# Altium PCB BLE-Control.PcbDoc
Units mm, origin at the board's own origin, x right, y up, seen from the top; angles counter-clockwise.
Board outline 41 x 30 mm, 4 copper layers (L1_TOP, L2_GND, L3_PWR_SIG, L4_BOTTOM), stack 0.956 mm thick; 99 components, 88 nets, 303 pads, 0 vias.
Unrouted connection lines stored in the file: 210.
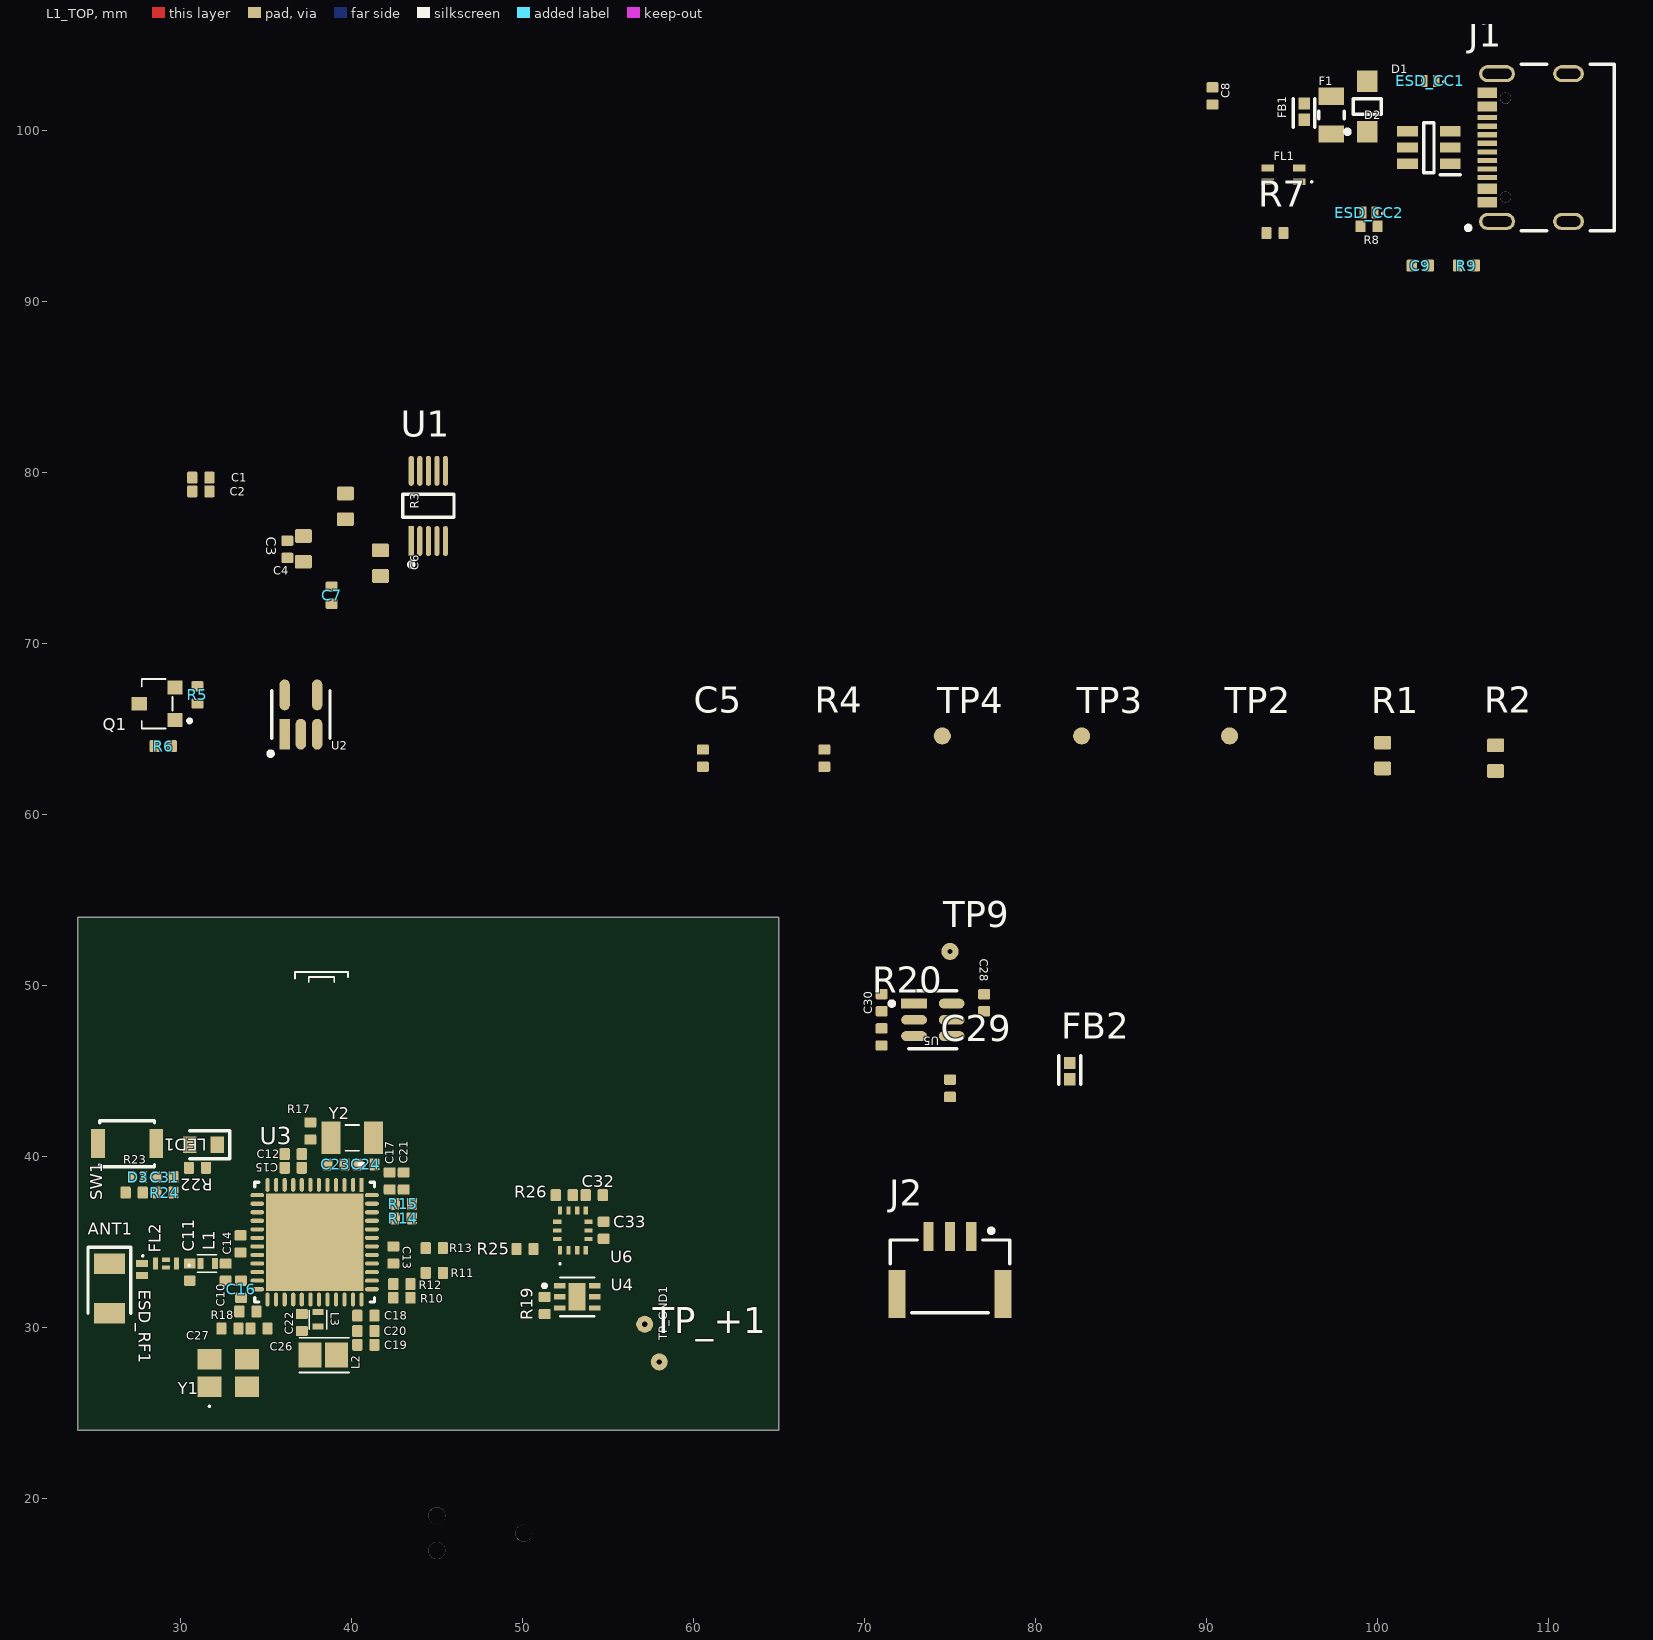
[diagram p0: L1_TOP view]
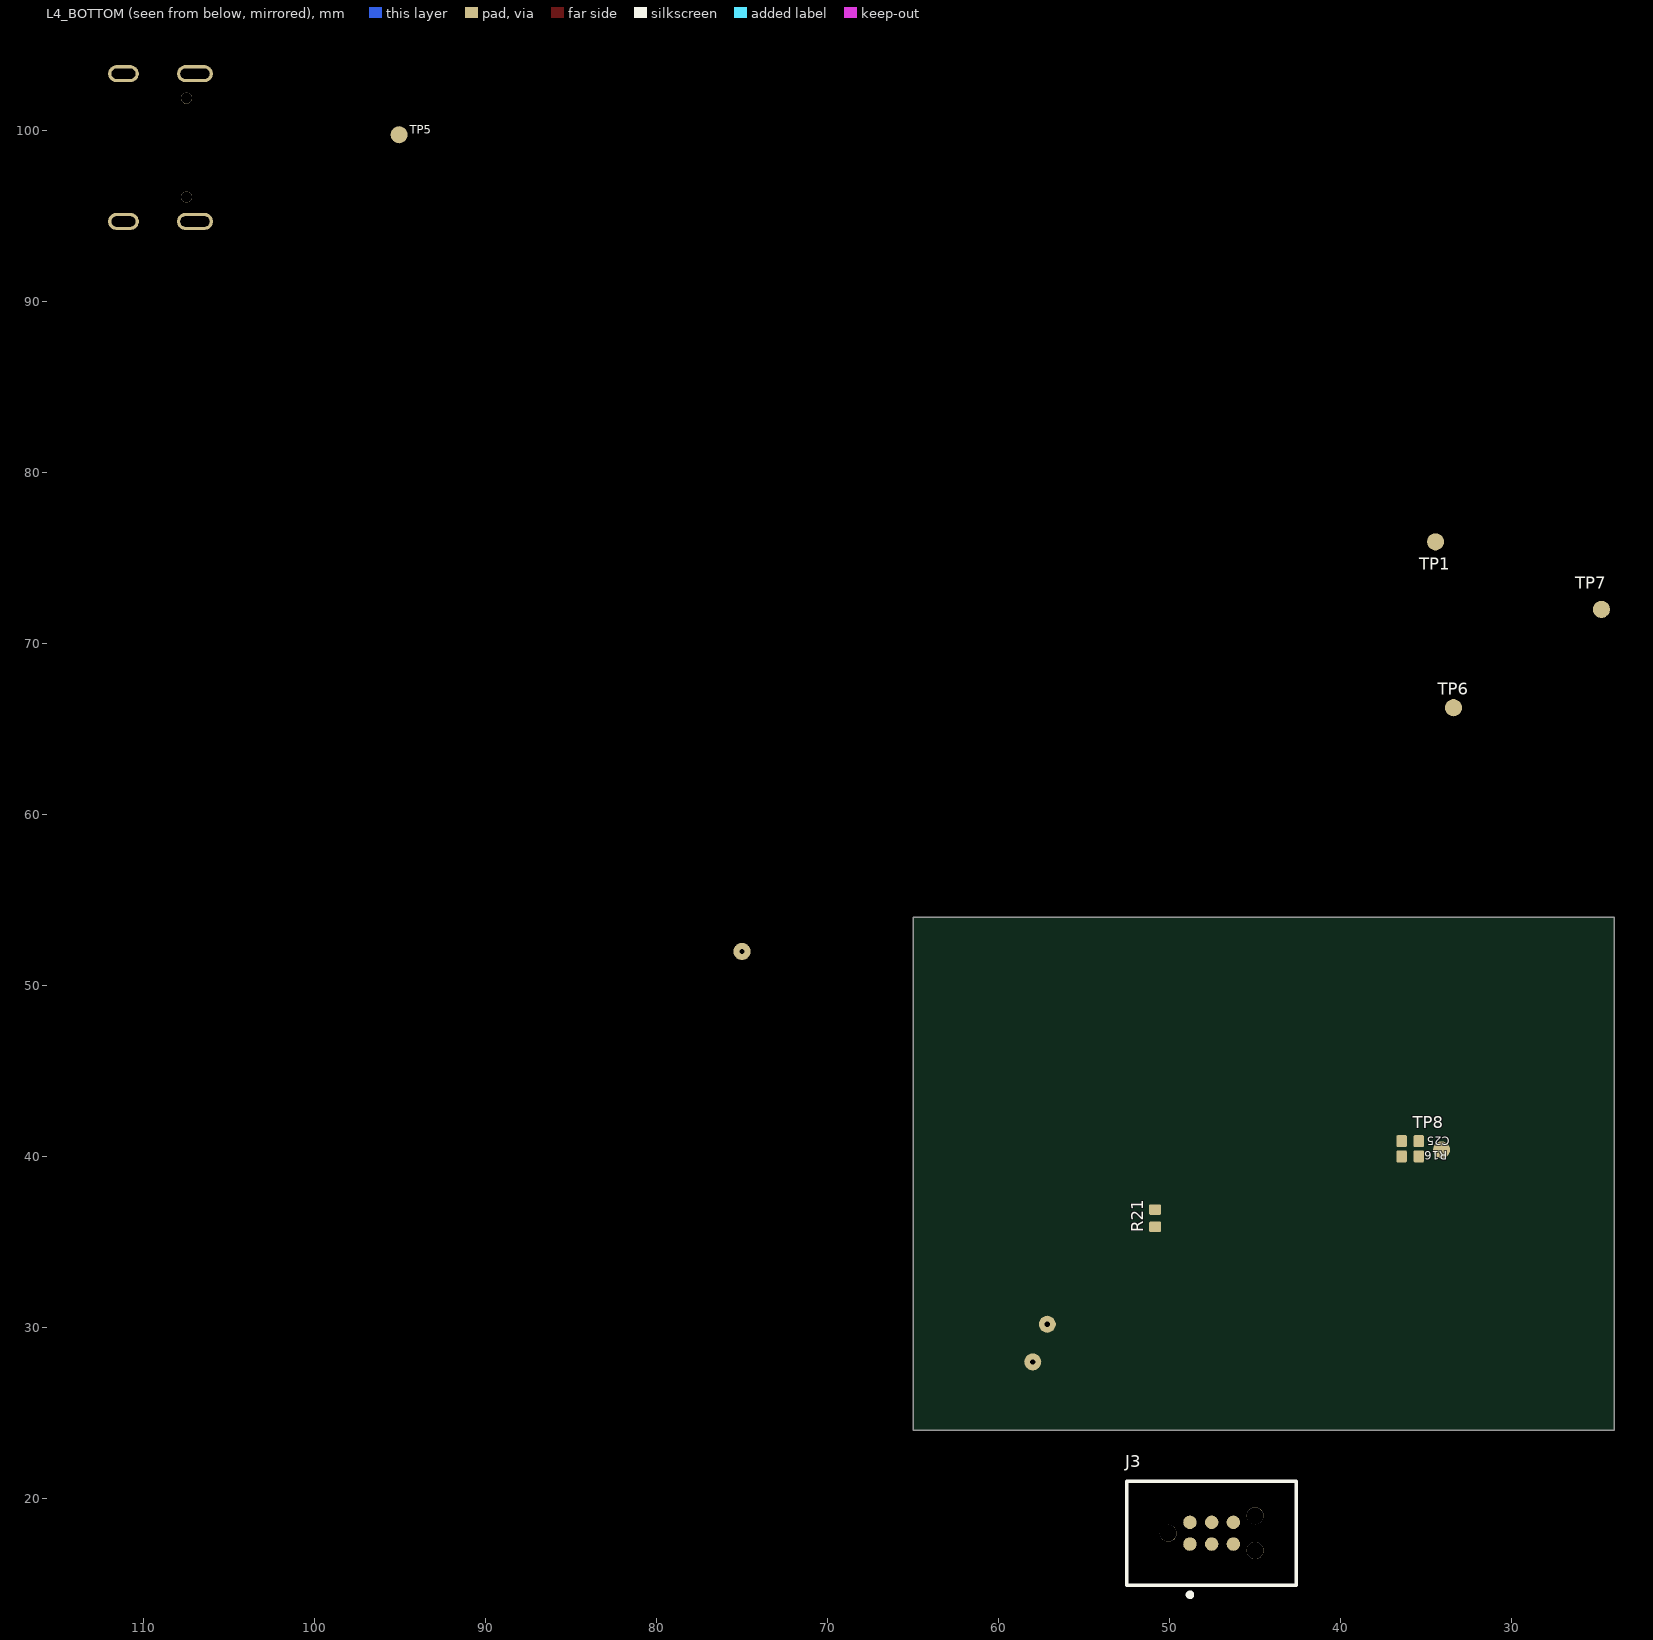
[diagram p1: L4_BOTTOM view, seen from below]
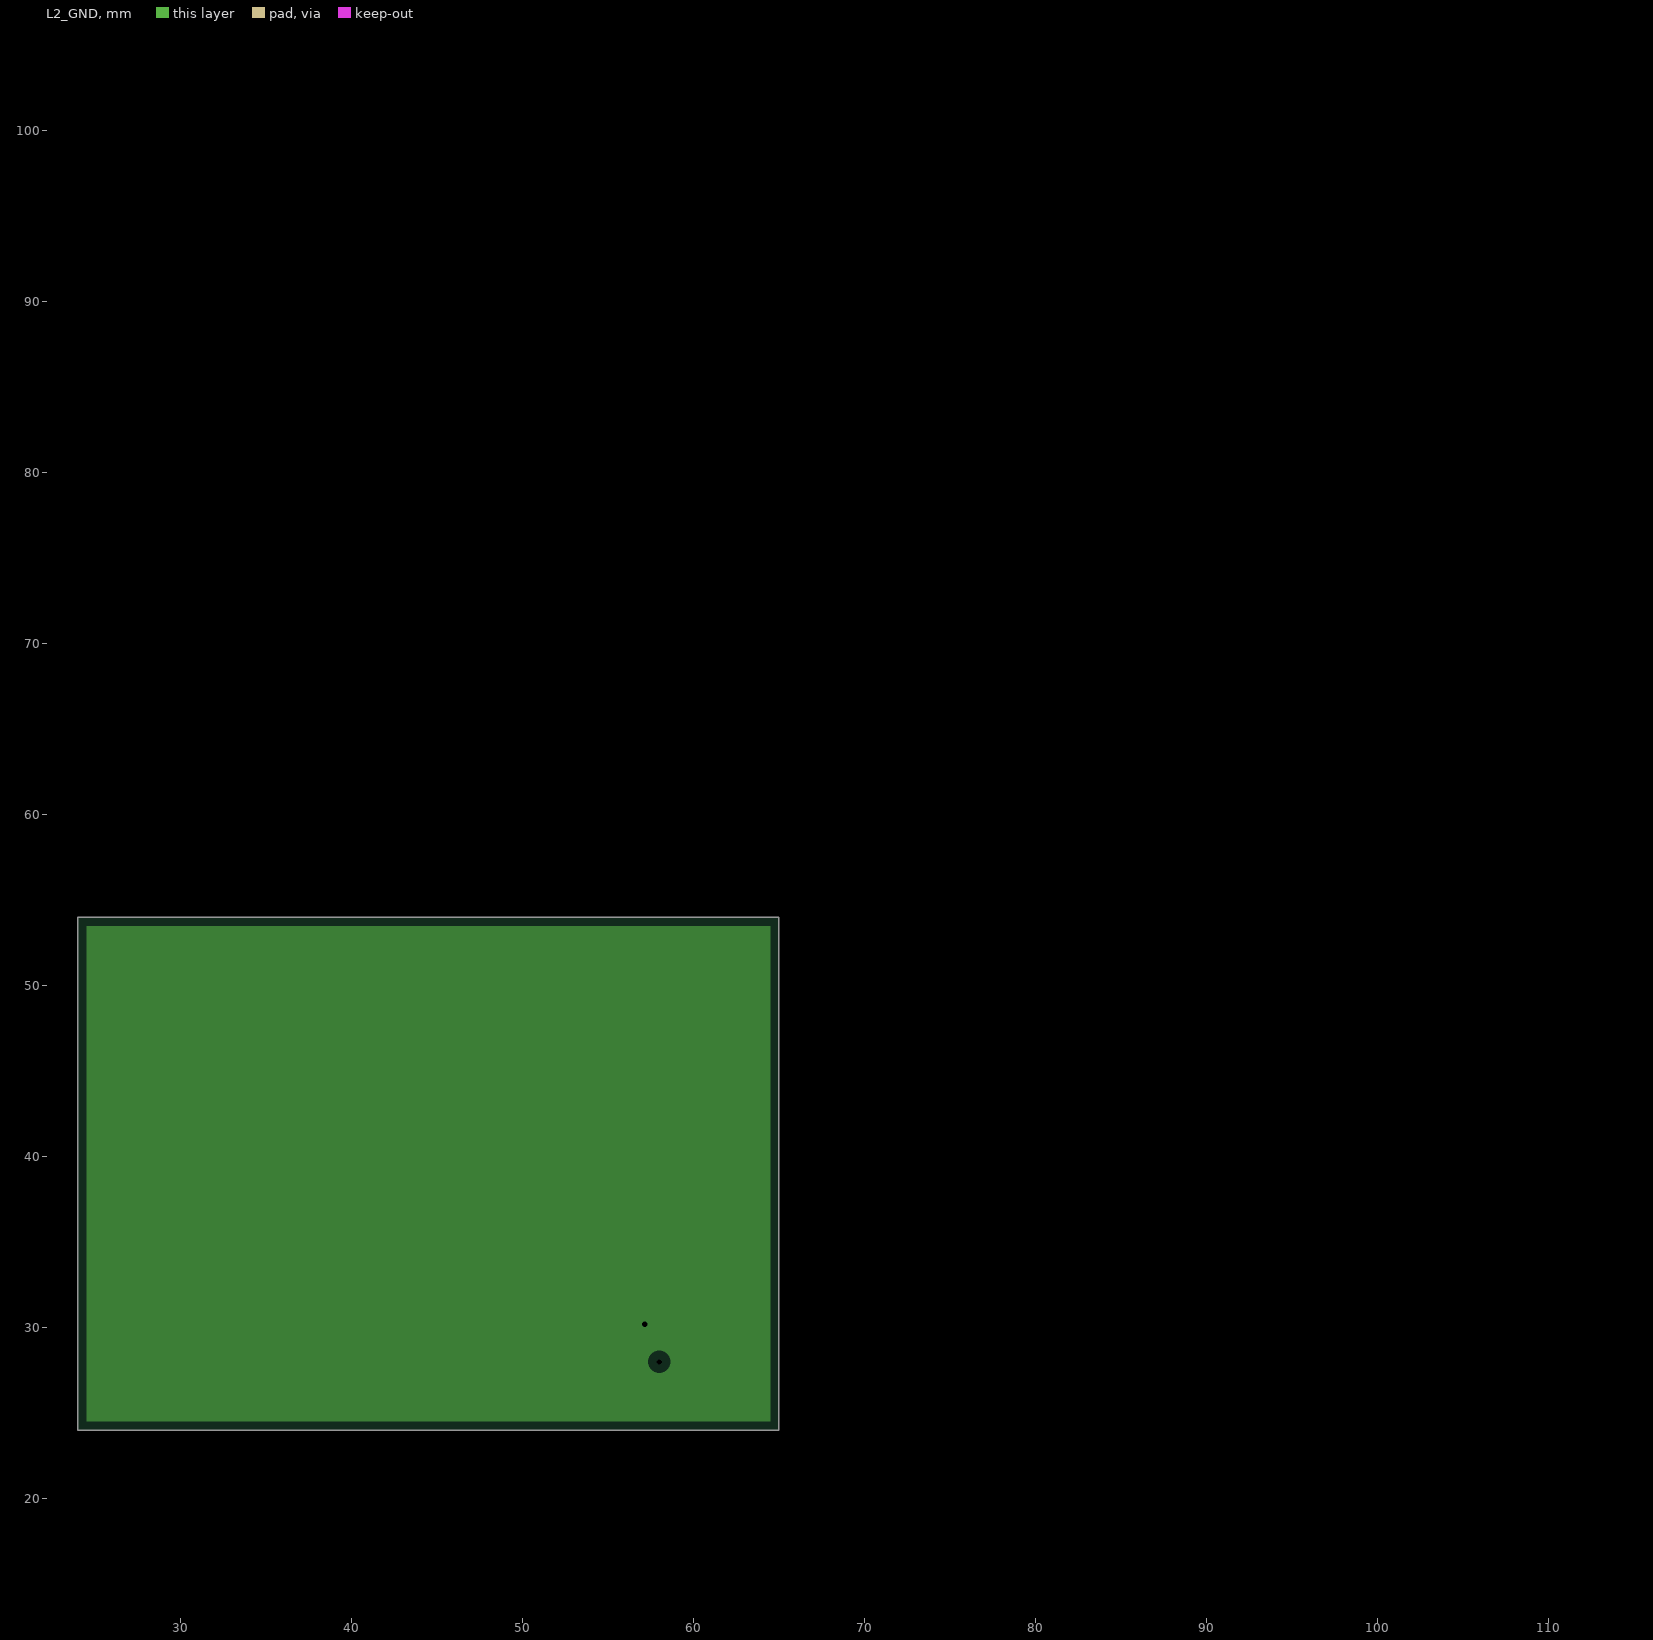
[diagram p2: L2_GND, clearances drawn from the general rule]
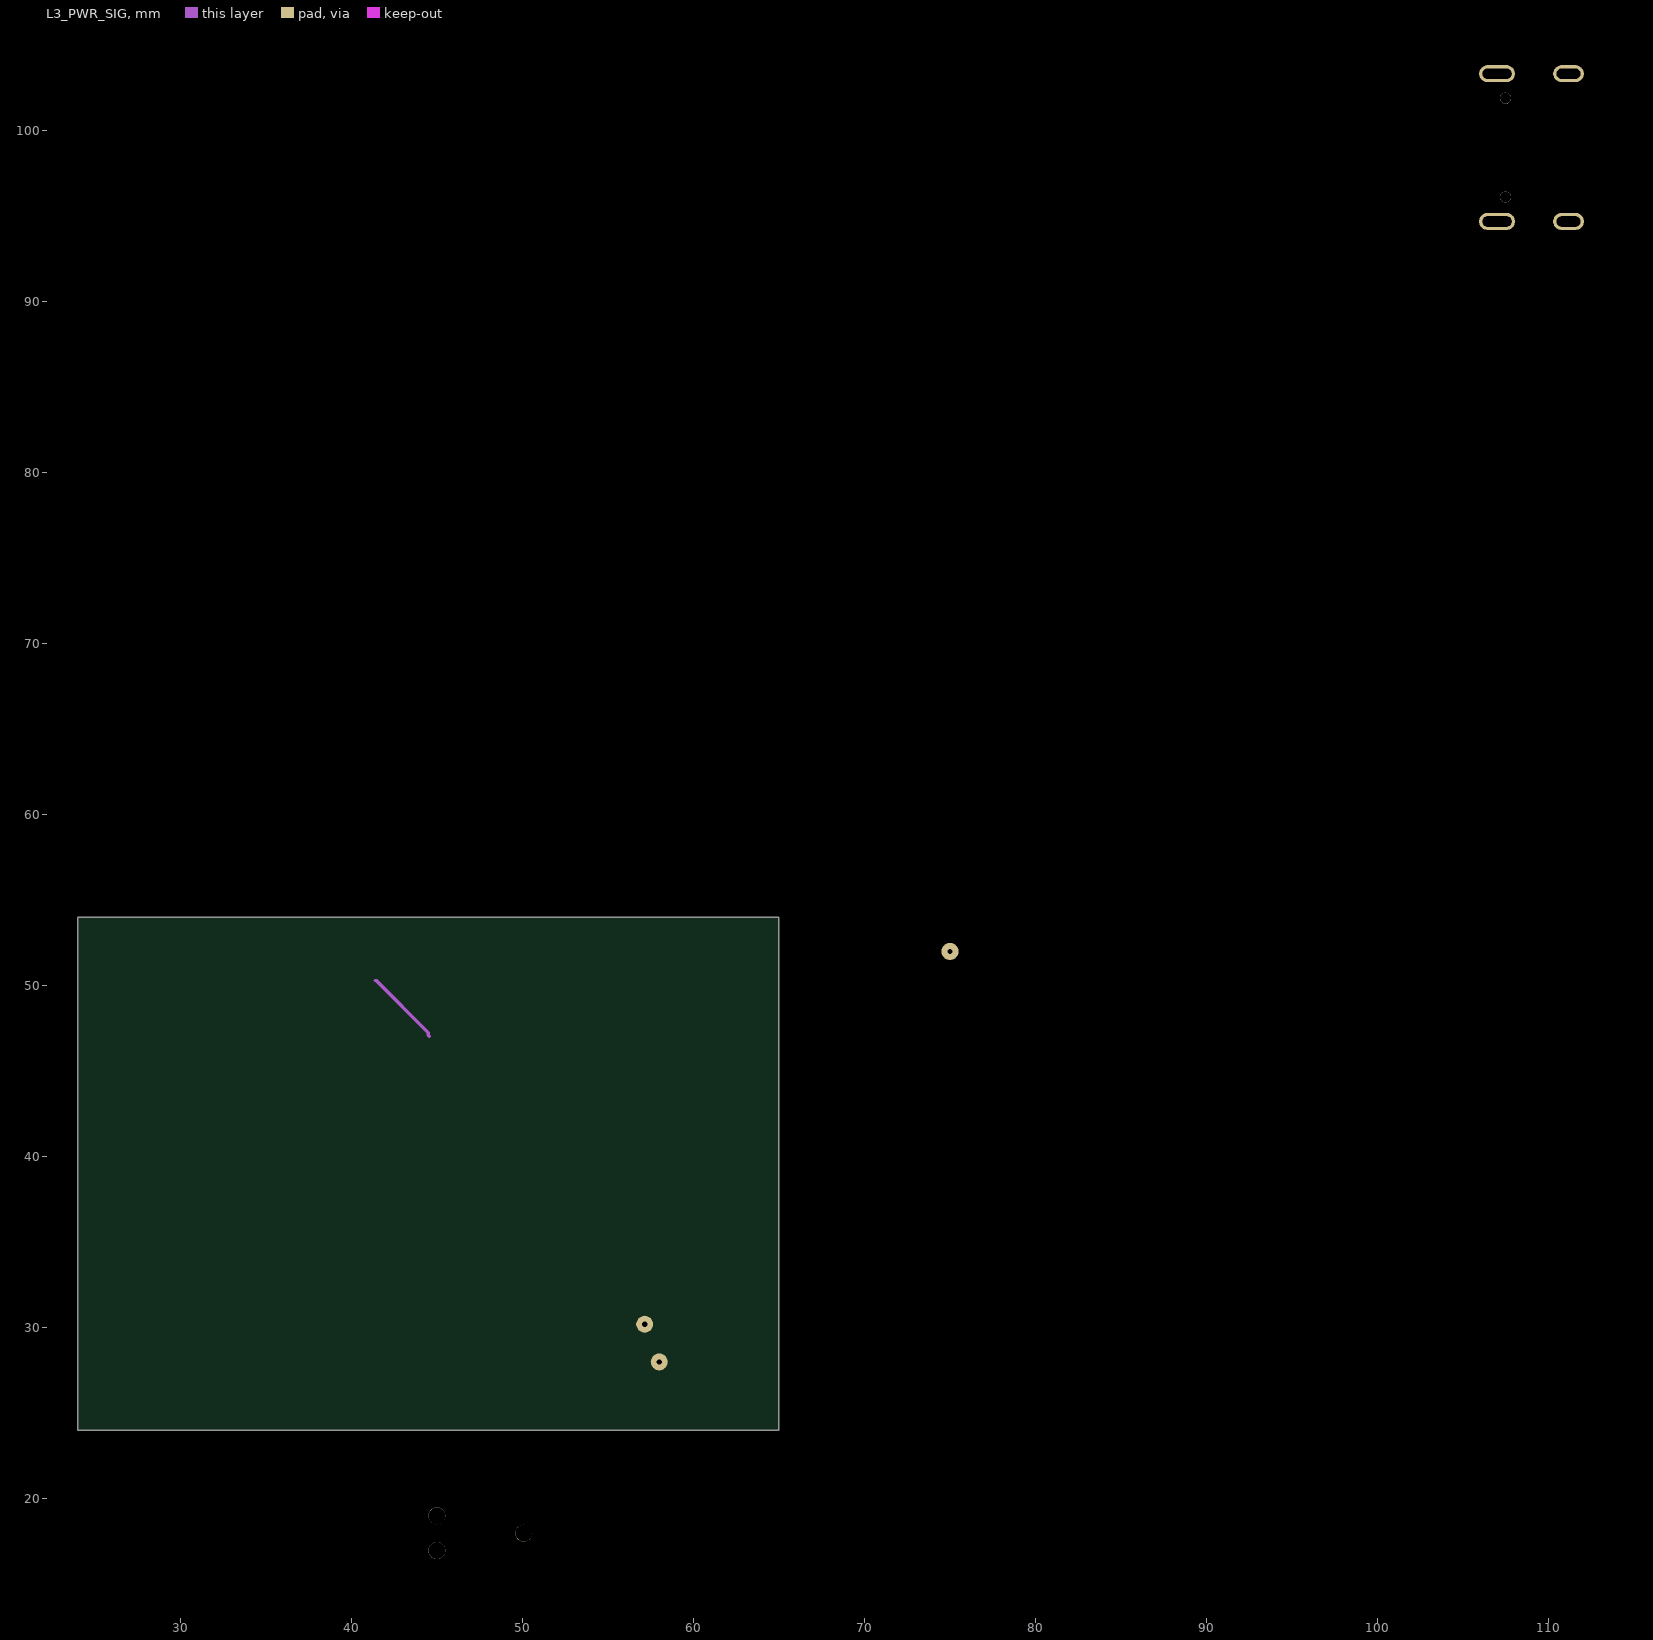
[diagram p3: L3_PWR_SIG]

## Layer stack, top to bottom
Top Solder: solder mask 0.0102, Solder Resist, Dk 3.5
L1_TOP: signal copper 0.018
Dielectric 2: prepreg 0.15, PP-006, Dk 4.1
L2_GND: plane copper 0.035, net GND
Dielectric 1: dielectric 0.55, FR-4, Dk 4.8
L3_PWR_SIG: signal copper 0.035
Dielectric 3: prepreg 0.15, PP-006, Dk 4.1
L4_BOTTOM: signal copper 0.018
Bottom Solder: solder mask 0.0102, Solder Resist, Dk 3.5

## Board outline
24,24 24,54 65,54 65,24

## Design rules (kind name [scope] priority, off if disabled: settings)
AssemblyTestPointUsage [InNetClass('DFT_REQUIRED')] p1:
AssemblyTestpoint [All] p1: testpointundercomponent=FALSE minsize=0.8 maxsize=1.5 preferedsize=1 minholesize=0 maxholesize=0 preferedholesize=0 testpointgrid=0.025 usegrid=TRUE gridtolerance=0 allowsidetop=TRUE allowsidebottom=TRUE minspacing=1 compbodyclearance=0.5 boardedgeclearance=0.5 padholecenterclearance=0.5 viaholecenterclearance=0.5
BoardOutlineClearance [All and Not InNamedUnion('OFFBOARD_UNION')] p1: gap=0.4 ignorepadtopadclearanceinfootprint=FALSE
Clearance Clearance_NoiseToAnalog [InNetClass('PWR_MAIN') vs InNetClass('SENS_ANALOG')] p1: gap=0.2 ignorepadtopadclearanceinfootprint=FALSE
Clearance Clearance_J3_Keepout [InComponent('J3') and IsPad vs InComponent('J3') and IsPad] p2: gap=0 ignorepadtopadclearanceinfootprint=FALSE
Clearance Clearance_PowerToAll [InNetClass('PWR_MAIN')] p3: gap=0.15 ignorepadtopadclearanceinfootprint=FALSE
Clearance Clearance_Default [All] p4: gap=0.2 ignorepadtopadclearanceinfootprint=TRUE
DiffPairsRouting [InDifferentialPairClass('USB')] p1: maxlimit=0.127 minlimit=0.127 mostfreqgap=0.127 toplayer_minwidth=0.252 toplayer_maxwidth=0.252 toplayer_prefwidth=0.252 bottomlayer_minwidth=0.252 bottomlayer_maxwidth=0.252 bottomlayer_prefwidth=0.252 impedanceprofiledriven=TRUE impedanceprofileid={DE8336D6-20E7-483A-A386-759F476F62F6} impedanceprofilevalue=90.000000 maxuncoupledlength=3
HoleSize [All] p1: absolutevalues=TRUE maxlimit=6 minlimit=0.3 maxpercent=80.000 minpercent=20.000
MinimumAnnularRing [All] p1: minimumring=0.15
MinimumSolderMaskSliver MaskSliver_FL2 [InComponent('FL2') vs InComponent('FL2')] p1: minsoldermaskwidth=0.005
MinimumSolderMaskSliver MaskSliver_IC5_IC7 [InComponent('IC5') or InComponent('IC7') vs InComponent('IC5') or InComponent('IC7')] p2: minsoldermaskwidth=0.04
MinimumSolderMaskSliver [All] p3: minsoldermaskwidth=0.1
NetAntennae [InNetClass('USB_FS') or InNetClass('rf_50ohms')] p1: netantennaetolerance=0
PlaneClearance [All] p1: clearance=0.508
PlaneConnect [All] p1: planeconnectstyle=Relief reliefexpansion=0.508 reliefentries=4 reliefconductorwidth=0.254 reliefairgap=0.254
PolygonConnect [All] p1: connectstyle=Relief reliefconductorwidth=0.254 reliefentries=4 polygonreliefangle="90 Angle" airgapwidth=0.254
RoutingVias [All] p1: holewidth=0.3 width=0.6 viastyle="Through Hole" minholewidth=0.3 minwidth=0.6 maxholewidth=0.4 maxwidth=0.8
SilkToSilkClearance [All] p1: silktosilkclearance=0.14
SilkToSolderMaskClearance [IsPad] p1: minsilkscreentomaskgap=0.1 clearancetoexposedcopper=TRUE
SolderMaskExpansion [All] p1: expansion=0.05 istentingtop=FALSE
SupplyNets "Schematic Supply Nets" [InNet('+3V3_SYS')] p1: voltage=0.000
SupplyNets "Schematic Supply Nets_1" [InNet('GND')] p2: voltage=0.000
Width Width_RF_50ohms [InNetClass('RF_50ohm')] p1: maxlimit=0.369 minlimit=0.369 preferedwidth=0.369 impedanceprofiledriven=TRUE impedanceprofileid={8354FB37-9734-4E4A-85FF-B50614A90945} impedanceprofilevalue=50.000000 minimp=50.000000 maximp=50.000000 favimp=50.000000
Width Width_USB_FS [InNetClass('USB_FS')] p2: maxlimit=0.254 minlimit=0.25 preferedwidth=0.254 toplayer_maxwidth=0.25 toplayer_prefwidth=0.25 midlayer1_minwidth=0.254 bottomlayer_maxwidth=0.25 bottomlayer_prefwidth=0.25 minimp=50.000000 maximp=50.000000 favimp=50.000000
Width Width_PWR_MAIN [InNetClass('PWR_MAIN')] p3: maxlimit=0.8 minlimit=0.25 preferedwidth=0.5 minimp=50.000000 maximp=50.000000 favimp=50.000000
Width Width_SENS_ANALOG [InNetClass('SENS_ANALOG')] p4: maxlimit=0.4 minlimit=0.2 preferedwidth=0.25
Width Width_SENS_DIG [InNetClass('SENS_DIG')] p5: maxlimit=0.3 minlimit=0.2 preferedwidth=0.2
Width [InNetClass('All Nets')] p6: maxlimit=0.5 minlimit=0.2 preferedwidth=0.25 minimp=50.000000 maximp=50.000000 favimp=50.000000
20 further rules are at their usual default settings.

## Classes and differential pairs
net class DFT_REQUIRED: 3V3_SENS +3V3_SYS +3V3_SYS_RB BAT_NTC_10K BMI270_INT1 BMI270_INT2 BOOT0 CHG_PG CHG_PROG CHG_STAT1 CHG_STAT2 GND I2C_SENS_MCU_SCL I2C_SENS_MCU_SDA I2C_SENS_SCL I2C_SENS_SDA SENS_EN SWCLK SWDIO TMP117_ALERT USB_VBUS VBAT_PROT VBATT_RAW
net class SWD_DEBUG: BOOT0 NRESET SWCLK SWDIO SWO
net class SENS_DIG: BMI270_INT1 BMI270_INT2 I2C_SENS_MCU_SCL I2C_SENS_MCU_SDA I2C_SENS_SCL I2C_SENS_SDA
net class CLOCKS: HSE_IN HSE_OUT LSE_IN LSE_OUT
net class R7_Nets: GND USB_CC2
net class J2_Nets: BAT_NTC_10K GND NetJ2_4 NetJ2_5 VBATT_RAW
net class TP6_Nets: VBAT_PROT
net class R21_Nets: 3V3_SENS NetR21_1
net class R6_Nets: GND NetQ1_1
net class R5_Nets: NetQ1_1 VBAT_PROT
net class R1_Nets: CHG_PG VIN_CHG
net class Q1_Nets: NetQ1_1 VBAT_PROT VBATT_RAW
net class C33_Nets: 3V3_SENS GND
net class C21_Nets: +3V3_SYS GND
net class C18_Nets: +3V3_SYS GND
net class C17_Nets: +3V3_SYS GND
net class C2_Nets: +3V3_SYS GND
net class C1_Nets: +3V3_SYS GND
net class TP_+1_Nets: +3V3_SYS
net class U6_Nets: 3V3_SENS BMI270_INT1 BMI270_INT2 GND I2C_SENS_SCL I2C_SENS_SDA NetR21_1 NetU6_2 NetU6_3 NetU6_10 NetU6_11
net class U2_Nets: +3V3_SYS GND NetU2_4 VBAT_PROT
net class U1_Nets: CHG_PG CHG_PROG CHG_STAT1 CHG_STAT2 GND NetU1_8 VBAT_PROT VIN_CHG
net class TP7_Nets: BAT_NTC_10K
net class TP1_Nets: VBAT_PROT
net class TP2_Nets: CHG_STAT1
net class TP3_Nets: CHG_STAT2
net class TP4_Nets: CHG_PG
net class R23_Nets: +3V3_SYS BTN1_R
net class R22_Nets: +3V3_SYS NetLED1_2
net class R20_Nets: GND SENS_EN
net class R4_Nets: CHG_PROG GND
net class R2_Nets: CHG_STAT2 VIN_CHG
net class C29_Nets: +3V3_SYS GND
net class C8_Nets: GND VIN_CHG
net class C28_Nets: +3V3_SYS GND
net class C14_Nets: +3V3_SYS GND
net class C26_Nets: GND HSE_IN
net class C27_Nets: GND R_HSE_OUT
net class R15_Nets: I2C_SENS_MCU_SDA I2C_SENS_SDA
net class R14_Nets: I2C_SENS_MCU_SCL I2C_SENS_SCL
net class SENS_ANALOG: BAT_NTC_10K
net class PWR_MAIN: 3V3_SENS +3V3_SYS USB_VBUS VBAT_PROT VBATT_RAW VIN_CHG
net class I2C: BMI270_INT1 BMI270_INT2 TMP117_ALERT
net class DIG_FAST: NetJ3_2 NetJ3_4 NRESET SWO
net class Y2_Nets: LSE_IN LSE_OUT
net class Y1_Nets: GND HSE_IN R_HSE_OUT
net class USB_FS: USB_FS_CONN_N USB_FS_CONN_P USB_FS_FIL_N USB_FS_FIL_P USB_FS_N USB_FS_P USB_FS_R_N USB_FS_R_P
net class TP8_Nets: BOOT0
net class TP_GND1_Nets: GND
net class TP9_Nets: +3V3_SYS
net class TP5_Nets: USB_VBUS
net class SW1_Nets: BTN1_R GND
net class R8_Nets: GND USB_CC1
net class R3_Nets: CHG_STAT1 VIN_CHG
net class R9_Nets: GND MNT
net class R17_Nets: BOOT0 GND
net class R24_Nets: BTN1 BTN1_R
net class R26_Nets: BMI270_INT2 GND
net class R25_Nets: BMI270_INT1 GND
net class R19_Nets: 3V3_SENS TMP117_ALERT
net class R18_Nets: HSE_OUT R_HSE_OUT
net class R16_Nets: +3V3_SYS NRESET
net class R12_Nets: USB_FS_P USB_FS_R_P
net class R10_Nets: USB_FS_N USB_FS_R_N
net class R11_Nets: NetJ3_2 SWDIO
net class R13_Nets: NetJ3_4 SWCLK
net class ESD_CC1_Nets: GND USB_CC2
net class LED1_Nets: LED_STAT_N NetLED1_2
net class L3_Nets: SMPSFB SMPSLXL
net class L2_Nets: SMPSLX SMPSLXL
net class L1_Nets: RF1 RF1_FLT
net class J3_Nets: +3V3_SYS GND NetJ3_2 NetJ3_4 NRESET SWO
net class J1_Nets: GND MNT NetJ1_A8 NetJ1_B8 USB_CC1 USB_CC2 USB_FS_CONN_N USB_FS_CONN_P USB_VBUS
net class U5_Nets: +3V3_SYS +3V3_SYS_RB GND NetU5_4 NetU5_5 SENS_EN
net class U4_Nets: 3V3_SENS GND I2C_SENS_SCL I2C_SENS_SDA NetU4_7 TMP117_ALERT
net class U3_Nets: +3V3_SYS BMI270_INT1 BMI270_INT2 BOOT0 BTN1 GND HSE_IN HSE_OUT I2C_SENS_MCU_SCL I2C_SENS_MCU_SDA LED_STAT_N LSE_IN LSE_OUT NetU3_5 NetU3_6 NetU3_9 NetU3_10 NetU3_12 NetU3_15 NetU3_16 NetU3_18 NetU3_19 NetU3_26 NetU3_27 NetU3_28 NetU3_29 NetU3_30 NetU3_36 NetU3_44 NRESET RF1 SENS_EN SMPSFB SMPSLX SWCLK SWDIO SWO TMP117_ALERT USB_FS_N USB_FS_P VDDMPS
net class FL1_Nets: USB_FS_FIL_N USB_FS_FIL_P USB_FS_R_N USB_FS_R_P
net class FL2_Nets: GND RF1_ANT RF1_FLT
net class FB1_Nets: VIN_CHG VIN_CHG_F
net class FB2_Nets: +3V3_SYS +3V3_SYS_RB
net class F1_Nets: USB_VBUS VIN_CHG_F
net class ESD_RF1_Nets: GND RF1_ANT
net class ESD_CC2_Nets: GND USB_CC1
net class D2_Nets: GND USB_FS_CONN_N USB_FS_CONN_P USB_FS_FIL_N USB_FS_FIL_P USB_VBUS
net class D1_Nets: GND USB_VBUS
net class D3_Nets: BTN1_R GND
net class C7_Nets: GND VBAT_PROT
net class C6_Nets: GND VBAT_PROT
net class C3_Nets: GND VBAT_PROT
net class C5_Nets: GND VIN_CHG
net class C4_Nets: GND VIN_CHG
net class C31_Nets: BTN1_R GND
net class C32_Nets: 3V3_SENS GND
net class C30_Nets: +3V3_SYS_RB GND
net class C25_Nets: GND NRESET
net class C24_Nets: GND LSE_IN
net class C23_Nets: GND LSE_OUT
net class C22_Nets: GND SMPSFB
net class C15_Nets: +3V3_SYS GND
net class C20_Nets: GND VDDMPS
net class C19_Nets: GND VDDMPS
net class C16_Nets: +3V3_SYS GND
net class C11_Nets: GND RF1_FLT
net class C10_Nets: GND RF1
net class C13_Nets: +3V3_SYS GND
net class C12_Nets: +3V3_SYS GND
net class C9_Nets: GND MNT
net class ANT1_Nets: NetANT1_2 RF1_ANT
differential pair class USB: USB_FS USB_FS_CONN USB_FS_FIL USB_FS_R
net class RF_50ohm: RF1 RF1_ANT RF1_FLT
component class Sensor_IO_Buttons_LED: C28 C29 C30 C31 C32 C33 D3 FB2 LED1 R17 R20 R21 R22 R23 R24 R26 SW1 TP9 U4 U5 U6
component class MCU_RF: 0.7 ANT1 C11 C14 C16 C19 C22 C24 C25 C26 C27 ESD_RF1 FL2 J3 L1 L2 L3 R10 R12 R16 R17 R18 TP8 TP_+1 TP_GND1 U3 Y1 Y2
component class Power_Charge_USB: C1 C2 C3 C6 C7 C16 C19 C26 C27 D1 D2 ESD_CC1 F1 FB1 FL1 J1 Q1 R2 R3 R4 R6 R8 R9 R12 R18 TP1 TP2 TP3 TP4 TP5 TP6 TP7 U1 U2
differential pair USB_FS: +USB_FS_P -USB_FS_N
differential pair USB_FS_R: +USB_FS_R_P -USB_FS_R_N
differential pair USB_FS_FIL: +USB_FS_FIL_P -USB_FS_FIL_N
differential pair USB_FS_CONN: +USB_FS_CONN_P -USB_FS_CONN_N

## Components (designator, comment, footprint, x,y, rotation, side; value= is the part's Value field where it differs from the comment)
ANT1 "2450AT18A100E" ANTC3216X140N 25.85,32.3 r270 top
C1 "100nF" CAP_0402 31.2,79.7 r180 top
C2 "1uF" CAP_0402 31.2,78.9 r180 top
C3 "1uF" CAP_0402 36.26,75.51 r270 top
C4 "4.7u" CAP_0603 37.19,75.54 r270 top
C5 "100n" CAP_0402 60.55,63.3 r90 top
C6 "4.7u" CAP_0603 41.7,74.7 r90 top
C7 "100n" CAP_0402 38.85,72.825 r90 top
C8 "1uF" CAP_0402 90.35,102.025 r270 top locked
C9 "1nF" CAP_0402 102.5,92.1 r180 top
C10 "0.8pF" CAP_0402 32.65,33.25 r90 top
C11 "0.3pF" CAP_0402 30.55,33.25 r90 top
C12 "4.7uF" CAP_0402 36.6,40.15 r0 top
C13 "100nF" CAP_0402 42.45,34.25 r270 top
C14 "100nF" CAP_0402 33.52,34.9 r270 top
C15 "100nF" CAP_0402 36.6,39.35 r0 top
C16 "100nF" CAP_0402 33.55,32.25 r90 top
C17 "100nF" CAP_0402 42.24,38.58 r270 top
C18 "100nF" CAP_0402 40.85,30.7 r180 top
C19 "100nF" CAP_0402 40.85,29 r180 top
C20 "4.7uF" CAP_0402 40.85,29.8 r180 top
C21 "100nF" CAP_0402 43.06,38.58 r270 top
C22 "4.7uF" CAP_0402 37.1,30.3 r90 top
C23 "10pF" CAP_0402 39.1,39.55 r0 top
C24 "10Fp" CAP_0402 40.85,39.55 r180 top
C25 "100nF" CAP_0402 35.93,40.91 r0 bottom
C26 "10Fp" CAP_0402 34.6,29.95 r0 top
C27 "10pF" CAP_0402 32.9,29.95 r0 top
C28 "100n" CAP_0402 77,49 r270 top
C29 "1uF" CAP_0402 75,44 r90 top
C30 "1uF" CAP_0402 71,49 r90 top
C31 "100n" CAP_0402 29.1,38.8 r180 top
C32 "100n" CAP_0402 54.2,37.75 r180 top
C33 "100n" CAP_0402 54.75,35.7 r270 top
D1 "SMF5.0AT1G" ONSC-SOD-123FL-2-498_V 99.4,101.4 r90 top
D2 "USBLC6-2SC6Y" SOT95P280X145-6N 103,99 r180 top
D3 "PESD5V0S1UL,315" PESD5V0S1BL315 27.5,38.8 r180 top
ESD_CC1 "PESD5V0S1UL,315" PESD5V0S1BL315 103.079,102.9 r180 top
ESD_CC2 "PESD5V0S1UL,315" PESD5V0S1BL315 99.5,95.2 r180 top
ESD_RF1 "PESD5V0S1UL,315" PESD5V0S1BL315 27.75,33.4 r270 top
F1 "MF-PSMF050X-2" FP-MF-PSMF-MFG 97.3,100.9 r90 top value=0.15-0.9Ω
FB1 "BLM15AG121SN1D" FP-BLM15-0_05-IPC_A 95.7,101.1 r270 top
FB2 "BLM15AG121SN1D" FP-BLM15-0_05-IPC_A 82,45 r90 top
FL1 "ACM2012D-900-2P-T00" ACM2012D9002PT00 94.5,97.4 r180 top
FL2 "DLF162500LT-5028A1" "DLF162500LT5028A1 - duplicate" 29.163,33.75 r180 top
J1 "USB4105-GF-A" FP-USB4105-GF-A-MFG 110,99 r90 top
J2 "BM03B-GHS-TBT (LF)(SN)(N)" FP-BM03B-GHS-TBT_LF_SN-MFG 75,33 r0 top
J3 "TC2030-CTX-NL" Tag_Connect_0_MFG 47.54,17.984 r180 bottom
L1 "2.7nH" FP-LQW15AN_00-W0_6-0_1-MFG 31.6,33.75 r180 top
L2 "10uH" FP-LQM21FN_70-IPC_B 38.35,28.4 r0 top
L3 "10nH" FP-LQW15AN_00-W0_6-0_1-MFG 38.05,30.5 r270 top
LED1 "19-217_GHC-YR1S2_3T" LEDC1608X50N 31.35,40.7 r180 top
Q1 "SSM3J332R,LF" SSM3J332RLFT 28.64,66.48 r90 top locked
R1 "100k" RES_0603 100.3,63.45 r90 top
R2 "100k" RES_0603 106.9,63.3 r90 top
R3 "100k" RES_0603 39.65,78.025 r90 top locked
R4 "10k" RES_0402 67.65,63.3 r90 top
R5 "1M" RES_0402 31,67 r270 top
R6 "100k" RES_0402 29,64 r0 top
R7 "5k1" RES_0402 94,94 r0 top
R8 "5k1" RES_0402 99.5,94.4 r180 top
R9 "1M" RES_0402 105.2,92.1 r0 top
R10 "22R" RES_0402 42.95,31.75 r0 top
R11 "22R" RES_0402 44.85,33.2 r0 top
R12 "22R" RES_0402 42.95,32.55 r0 top
R13 "22R" RES_0402 44.85,34.65 r0 top
R14 "22R" RES_0402 43.03,36.39 r0 top
R15 "22R" RES_0402 43.04,37.24 r0 top
R16 "10k" RES_0402 35.93,40.01 r180 bottom
R17 "100k" RES_0402 37.6,41.5 r270 top
R18 "0R" RES_0402 33.95,30.95 r0 top
R19 "10k" RES_0402 51.3,31.3 r90 top
R20 "100k" RES_0402 71,47 r270 top
R21 "10k" RES_0402 50.85,36.4 r90 bottom
R22 "1k" RES_0402 31,39.35 r0 top
R23 "470k" RES_0402 27.3,37.9 r180 top
R24 "100R" RES_0402 29.1,37.9 r0 top
R25 "100k" RES_0402 50.15,34.6 r0 top
R26 "100k" RES_0402 52.45,37.75 r0 top
SW1 "B3U-1000P" FP-B3U-1000P-MFG 26.89,40.76 r180 top
TP1 "TestPoint" PCBComponent_1 34.45,75.95 r90 bottom
TP2 "USB_VBUS" PCBComponent_1 91.35,64.6 r90 top
TP3 "USB_VBUS" PCBComponent_1 82.7,64.6 r90 top
TP4 "USB_VBUS" PCBComponent_1 74.55,64.6 r90 top
TP5 "USB_VBUS" PCBComponent_1 95.05,99.75 r90 bottom
TP6 "VBAT_PROT" PCBComponent_1 33.4,66.25 r90 bottom
TP7 "BAT_NTC_10K" PCBComponent_1 24.75,72 r90 bottom
TP8 "TestPoint" PCBComponent_1 34.1,40.4 r90 bottom
TP9 "" TP_VIA_0p75 75,52 r90 top
TP_+1 "TP_+3V3_SYS" TP_VIA_0p75 58,28 r90 top
TP_GND1 "TestPoint" TP_VIA_0p75 57.15,30.2 r90 top
U1 "MCP73833T-FCI/UN" FP-C04-021-IPC_B 44.5,78.05 r90 top
U2 "TPS7A0233PDBVR" FP-DBV0005A-IPC_A 37.05,65.85 r90 top
U3 "STM32WB55CGU6" FP-STM32WB55CGU6-IPC_C 37.85,35 r270 top locked
U4 "TMP117NAIDRVR" SON65P200X200X80-7N 53.2,31.8 r0 top
U5 "TPS22918DBVR" FP-DBV0006A-IPC_B 74,48 r0 top
U6 "BMI270" BMI270 52.95,35.688 r90 top
Y1 "32MHz" NX3225SA32MHZEXS00ACS02368 32.8,27.35 r0 top locked
Y2 "32.768kHz" ABS07 40.05,41.1 r180 top

## Footprints (in the part's own frame and the unit in brackets; to place one, negate y for a bottom-side part, rotate by r counter-clockwise, add the part's x,y. Pads: shape width x height; smd on the part's side, far side on the other; paste and mask are expansions set on the pad)
ABS07 [mm]
  rect 1.1x1.9 smd: 1(-1.25,0) 2(1.25,0)
  silkscreen extent -0.4,-0.75 0.4,0.75, body extent -1.6,-0.75 1.6,0.75, height 0.9
ACM2012D9002PT00 [mm]
  rect 0.75x0.4 smd: 1(-0.925,0.4) 2(-0.925,-0.4) 3(0.925,-0.4) 4(0.925,0.4)
  silkscreen extent -1.7,0.35 -1.6,0.45, body extent -1.01,-0.6 0.99,0.6, height 1.2
ANTC3216X140N [mm]
  rect 1.2x1.8 smd: 1(-1.45,0) 2(1.45,0)
  silkscreen extent -2.4,-1.25 1.45,1.25, body extent -1.6,-0.8 1.6,0.8, height 1.4
BMI270 [mm]
  rect 0.475x0.25 smd: 1(-1.163,0.75) 2(-1.163,0.25) 3(-1.163,-0.25) 4(-1.163,-0.75) 8(1.162,-0.75) 9(1.162,-0.25) 10(1.162,0.25) 11(1.162,0.75)
  rect 0.25x0.475 smd: 5(-0.5,-0.913) 6(0,-0.913) 7(0.5,-0.913) 12(0.5,0.913) 13(0,0.913) 14(-0.5,0.913)
  silkscreen extent -2,0.7 -1.9,0.8, body extent -1.5,-1.25 1.5,1.25, height 0.83
CAP_0402 [mm]
  rrect25% 0.6x0.7 smd: 1(-0.5,0) 2(0.5,0)
  body extent -0.5,-0.26 0.5,0.26, height 0.37
CAP_0603 [mm]
  rrect25% 0.8x1 smd: 1(-0.75,0) 2(0.75,0)
  body extent -0.8,-0.4 0.8,0.4, height 0.51
"DLF162500LT5028A1 - duplicate" [mm]
  rect 0.275x0.7 smd: 1(-0.612,0) 3(0.613,0)
  rect 0.45x0.245 smd: 2(0,-0.227) 4(0,0.227)
  silkscreen extent -1.4,0.05 -1.3,0.15, body extent -0.83,-0.42 0.83,0.42, height 0.26
FP-B3U-1000P-MFG [mm]
  rect 0.8x1.7 smd paste+0 mask+0: 1(-1.7,0) 2(1.7,0)
  silkscreen extent -1.6,-1.35 1.6,1.35, body extent -2.2,-1.45 2.2,1.45, height 0.25
FP-BLM15-0_05-IPC_A [mm]
  rect 0.715x0.672 smd paste+0 mask+0: 1(-0.479,0) 2(0.479,0)
  silkscreen extent -0.76,-0.64 0.91,0.64, body extent -1.04,-0.54 1.04,0.54, height 0.25
FP-BM03B-GHS-TBT_LF_SN-MFG [mm]
  rect 0.6x1.7 smd paste+0 mask+0: 1(1.25,2.325) 2(0,2.325) 3(-1.25,2.325)
  rect 1x2.8 smd paste+0 mask+0: 4(-3.1,-1.025) 5(3.1,-1.025)
  silkscreen extent -3.5,-2.12 3.5,2.79, body extent -3.7,-2.52 3.7,3.27, height 0.25
FP-C04-021-IPC_B [mm]
  rect 1.754x0.303 smd paste+0 mask+0: 1(-2.05,1)
  rrect100% 1.754x0.303 smd paste+0 mask+0: 2(-2.05,0.5) 3(-2.05,0) 4(-2.05,-0.5) 5(-2.05,-1) 6(2.05,-1) 7(2.05,-0.5) 8(2.05,0) 9(2.05,0.5) 10(2.05,1)
  silkscreen extent -3.55,-1.5 0.67,1.5
FP-DBV0005A-IPC_A [mm]
  rect 1.805x0.612 smd paste+0 mask+0: 1(-1.15,0.95)
  rrect100% 1.805x0.612 smd paste+0 mask+0: 2(-1.15,0) 3(-1.15,-0.95) 4(1.15,-0.95) 5(1.15,0.95)
  silkscreen extent -2.41,-1.7 1.4,1.9, body extent -2.55,-1.95 2.55,1.95, height 0.25
FP-DBV0006A-IPC_B [mm]
  rect 1.505x0.57 smd paste+0 mask+0: 1(-1.1,0.95)
  rrect100% 1.505x0.57 smd paste+0 mask+0: 2(-1.1,0) 3(-1.1,-0.95) 4(1.1,-0.95) 5(1.1,0) 6(1.1,0.95)
  silkscreen extent -2.53,-1.7 1.4,1.7, body extent -2.1,-1.7 2.1,1.7, height 0.25
FP-LQM21FN_70-IPC_B [mm]
  rect 1.354x1.456 smd paste+0 mask+0: 1(-0.776,0) 2(0.776,0)
  silkscreen extent -1.4,-1.02 1.51,1.02, body extent -1.7,-0.98 1.7,0.98, height 0.25
FP-LQW15AN_00-W0_6-0_1-MFG [mm]
  rect 0.35x0.65 smd paste+0 mask+0: 1(-0.425,0) 2(0.425,0)
  silkscreen extent -0.51,-0.51 0.59,0.51, body extent -0.7,-0.45 0.7,0.45, height 0.25
FP-MF-PSMF-MFG [mm]
  rect 1x1.5 smd paste+0 mask+0: 1(-1.1,0) 2(1.1,0)
  silkscreen extent -0.23,-0.75 0.23,0.75, body extent -1.7,-0.85 1.7,0.85, height 0.25
FP-STM32WB55CGU6-IPC_C [mm]
  rect 0.81x0.242 smd paste+0 mask+0: 1(-3.351,2.75)
  rrect100% 0.81x0.242 smd paste+0 mask+0: 2(-3.351,2.25) 3(-3.351,1.75) 4(-3.351,1.25) 5(-3.351,0.75) 6(-3.351,0.25) 7(-3.351,-0.25) 8(-3.351,-0.75) 9(-3.351,-1.25) 10(-3.351,-1.75) 11(-3.351,-2.25) 12(-3.351,-2.75) 25(3.351,-2.75) 26(3.351,-2.25) 27(3.351,-1.75) 28(3.351,-1.25) 29(3.351,-0.75) 30(3.351,-0.25) 31(3.351,0.25) 32(3.351,0.75) 33(3.351,1.25) 34(3.351,1.75) 35(3.351,2.25) 36(3.351,2.75)
  rrect100% 0.242x0.81 smd paste+0 mask+0: 13(-2.75,-3.351) 14(-2.25,-3.351) 15(-1.75,-3.351) 16(-1.25,-3.351) 17(-0.75,-3.351) 18(-0.25,-3.351) 19(0.25,-3.351) 20(0.75,-3.351) 21(1.25,-3.351) 22(1.75,-3.351) 23(2.25,-3.351) 24(2.75,-3.351) 37(2.75,3.351) 38(2.25,3.351) 39(1.75,3.351) 40(1.25,3.351) 41(0.75,3.351) 42(0.25,3.351) 43(-0.25,3.351) 44(-0.75,3.351) 45(-1.25,3.351) 46(-1.75,3.351) 47(-2.25,3.351) 48(-2.75,3.351)
  rect 5.7x5.7 smd paste-1000 mask+0: 49(0,0)
  silkscreen extent -4.61,-3.5 3.5,3.5, body extent -3.86,-3.86 3.86,3.86, height 0.25
FP-USB4105-GF-A-MFG [mm]
  rrect100% 1x2.1 hole 1.7 slot 0.6 at 0 deg paste-2539.97 mask+0: 1(-4.32,3.015) 2(4.32,3.015)
  rrect100% 1x1.8 hole 1.4 slot 0.6 at 0 deg paste-2539.97 mask+0: 3(-4.32,-1.165) 4(4.32,-1.165)
  rect 0.6x1.15 smd paste+0 mask+0: A1-B12(-3.2,3.59) A4-B9(-2.4,3.59) B1-A12(3.2,3.59) B4-A9(2.4,3.59)
  rect 0.3x1.15 smd paste+0 mask+0: A5(-1.25,3.59) A6(-0.25,3.59) A7(0.25,3.59) A8(1.25,3.59) B5(1.75,3.59) B6(0.75,3.59) B7(-0.75,3.59) B8(-1.75,3.59)
  round 0.65 hole 0.65 unplated paste-2539.97 mask+0: ""(-2.89,2.515) ""(2.89,2.515)
  silkscreen extent -4.86,-3.84 4.86,4.82, body extent -4.96,-3.94 4.96,4.27, height 0.25
LEDC1608X50N [mm]
  rect 0.8x0.95 smd: 1(-0.8,0) 2(0.8,0)
  silkscreen extent -1.55,-0.82 0.8,0.82, body extent -0.84,-0.4 0.8,0.4, height 0.42
NX3225SA32MHZEXS00ACS02368 [mm]
  rect 1.4x1.2 smd: 1(-1.1,-0.8) 2(1.1,-0.8) 3(1.1,0.8) 4(-1.1,0.8)
  silkscreen extent -1.15,-2 -1.05,-1.9, body extent -1.68,-1.28 1.68,1.28, height 0.7
ONSC-SOD-123FL-2-498_V [mm] "SOD, 2-Leads, Body 2.7x1.65mm"
  rect 1.25x1.22 smd: 1(-1.475,0) 2(1.475,0)
  silkscreen extent -1.6,-0.82 0.45,1.28, body extent -1.35,-0.82 1.35,0.82, height 0.98
PCBComponent_1 [mm]
  round 1 smd: 1(0,0)
PESD5V0S1BL315 [mm]
  rect 0.4x0.7 smd: 1(-0.35,0) 2(0.35,0)
  silkscreen extent -0.85,0 -0.75,0.1, body extent -0.5,-0.3 0.5,0.3, height 0.47
RES_0402 [mm]
  rrect25% 0.6x0.7 smd: 1(-0.5,0) 2(0.5,0)
  body extent -0.5,-0.25 0.5,0.25, height 0.3
RES_0603 [mm]
  rrect25% 0.8x1 smd: 1(-0.75,0) 2(0.75,0)
  body extent -0.8,-0.43 0.8,0.43, height 0.52
SON65P200X200X80-7N [mm]
  rect 0.66x0.32 smd: 1(-1.025,0.65) 2(-1.025,0) 3(-1.025,-0.65) 4(1.025,-0.65) 5(1.025,0) 6(1.025,0.65)
  rect 1x1.6 smd paste-2: 7(0,0)
  silkscreen extent -2.01,-1.13 1,1.13, body extent -1,-1 1,1, height 0.8
SOT95P280X145-6N [mm]
  rect 1.2x0.6 smd: 1(-1.25,0.95) 2(-1.25,0) 3(-1.25,-0.95) 4(1.25,-0.95) 5(1.25,0) 6(1.25,0.95)
  silkscreen extent -1.85,-1.46 0.3,1.6, body extent -1.4,-1.46 1.4,1.46, height 1.45
SSM3J332RLFT [mm]
  rect 0.8x0.9 smd: 1(-0.95,-1.05) 2(0.95,-1.05) 3(0,1.05)
  silkscreen extent -1.45,-2 1.45,0.9, body extent -1.45,-1.2 1.45,1.2, height 0.79
Tag_Connect_0_MFG [mil]
  round 30.98 smd paste-39370.1 mask+0: 1(-50,-25) 2(-50,25) 3(0,-25) 4(0,25) 5(50,-25) 6(50,25)
  round 39.02 hole 39.02 unplated paste-99999 mask+0: ""(-100,0) ""(100,-40) ""(100,40)
  silkscreen extent -195,-147 195,120
TP_VIA_0p75 [mm]
  round 1 hole 0.3 mask+0: 1(0,0)

## Part data
ANT1: "Antenna", Manufacturer_Name="JOHANSON TECHNOLOGY", Mouser Part Number=609-2450AT18A100E, Arrow Part Number=2450AT18A100E, Arrow Price/Stock=https://www.arrow.com/en/products/2450at18a100e/johanson-dielectrics?utm_currency=USD&region=europe, Datasheet Link=https://www.johansontechnology.com/datasheets/2450AT18A100/2450AT18A100.pdf, Height=1.4mm, Manufacturer_Part_Number=2450AT18A100E, Mouser Price/Stock=https://www.mouser.co.uk/ProductDetail/Johanson-Technology/2450AT18A100E?qs=yCnrNFeXz%252BjzOYKPg7LGCw%3D%3D
C1 C2 C3 C5 C7 C13 C14 C15 C16 C17 C18 C19 C21 C23 C24 C25 C26 C27 C28 C31 C32 C33: library part C_0402, "Ceramic Chip Capacitor 0402", Dielectric=X7R, Package="0402 (1005)", Tolerance=10%, Voltage=10V, Height=0.35mm, ProductionStatus=Placeholder
C4 C6: library part CAP_0603, "Capacitor SMD 0603"
C8 C9 C12 C20 C22 C29 C30: library part C_0402, "Ceramic Chip Capacitor 0402", Dielectric=X7R, Package="0402 (1005)", Part Number=C1005X5R1E105K, Tolerance=10%, Voltage=10V, Height=0.35mm, PartNumber=C1005X5R1E105K, ProductionStatus=Placeholder
C10: library part C_0402, "GRM1555C1HR80BA01D", Dielectric=X7R, Package="0402 (1005)", Tolerance=10%, Voltage=10V, Height=0.35mm, ProductionStatus=Placeholder
C11: library part C_0402, "GRM1555C1HR30WA01D", Dielectric=X7R, Package="0402 (1005)", Tolerance=10%, Voltage=10V, Height=0.35mm, ProductionStatus=Placeholder
D1: library part CMP-1061-00612-1, "200 W Transient Voltage Suppressor, 2-Pin SOD-123FL, Pb-Free, Tape and Reel", Manufacturer="On Semiconductor", ComponentLink1Description="Manufacturer URL", ComponentLink1URL=http://www.onsemi.com/, ComponentLink2Description=Datasheet, ComponentLink2URL=http://www.onsemi.com/pub_link/Collateral/SMF5.0AT1-D.PDF, ComponentLink3Description="Package Specification", ComponentLink3URL=http://www.onsemi.com/pub_link/Collateral/498-01.PDF, DatasheetVersion="Rev. 7", Direction=Unidirectional, IR Max (uA)=400, Mounting Technology="Surface Mount", PackageDescription="2-Pin SOD, Body 1.65 x 2.7 mm", PackageReference=SOD-123FL-2-498, PackageVersion="Rev. D, 05/2013", Packing="Tape and Reel", PartNumber=SMF5.0AT1G, RoHS=Pb-Free, V(BR) Typ (V)=6.7
D2: "Diode", Manufacturer_Name=STMicroelectronics, Mouser Part Number=511-USBLC6-2SC6Y, Arrow Part Number=USBLC6-2SC6Y, Arrow Price/Stock=https://www.arrow.com/en/products/usblc6-2sc6y/stmicroelectronics?utm_currency=USD&region=nac, Datasheet Link=https://componentsearchengine.com/Datasheets/1/USBLC6-2SC6Y.pdf, Height=1.45mm, Manufacturer_Part_Number=USBLC6-2SC6Y, Mouser Price/Stock=https://www.mouser.co.uk/ProductDetail/STMicroelectronics/USBLC6-2SC6Y?qs=gNDSiZmRJS%2FOgDexvXkdow%3D%3D
D3 ESD_CC1 ESD_CC2 ESD_RF1: "Diode ESD (Uni-directional)", Manufacturer_Name=Nexperia, Mouser Part Number=771-PESD5V0S1UL315, Arrow Part Number=PESD5V0S1UL,315, Arrow Price/Stock=https://www.arrow.com/en/products/pesd5v0s1ul315/nexperia?utm_currency=USD&region=nac, Datasheet Link=https://assets.nexperia.com/documents/data-sheet/PESD5V0S1UL.pdf, Height=0mm, Manufacturer_Part_Number=PESD5V0S1UL,315, Mouser Price/Stock=https://www.mouser.co.uk/ProductDetail/Nexperia/PESD5V0S1UL315?qs=LOCUfHb8d9sSC%2FUB7ugsVw%3D%3D
F1: library part CMP-07400-000013-1, "PTC RESET FUSE 6V 500MA 0805", Ambient Temperature Range High=+85°C, Ambient Temperature Range Low=-40°C, Current Rating=40A, Hold Current=0.5A, Manufacturer="Bourns Inc.", Package=MF-PSMF, Resistance=0.15-0.9Ω, Temperature="-40°C to +85°C", Trip Current=1A, Voltage Rating=6V, Automotive=Yes, Category=Fuse, ComponentLink2Description=Datasheet, ComponentLink2URL=https://www.bourns.com/docs/product-datasheets/mfpsmf.pdf?sfvrsn=9c05cafe_24, Device Class L1="Circuit Protection", Device Class L2="PTC Resettable Fuses", Device Class L3=unset, Digikey Description="PTC RESET FUSE 6V 500MA 0805", Height=0.85mm, Lead Free=Yes, Manufacturer Part Number=MF-PSMF050X-2, Mouser Description="Resettable Fuses - PPTC .50A 6V 0.15ohm Hold .5 Trip 1", Octopart=https://octopart.com/mf-psmf050x-2-bourns-7483438, RoHS=TRUE, Temperature Range High=+85°C, Temperature Range Low=-40°C, Trip Time=0.1s
FB1 FB2: library part CMP-0686-00170-4, "Chip Ferrite Bead, 0402, 120Ω @ 100MHz, 0.19Ω, 25%, 550mA", Case Code (Imperial)=0402, Case Code (Metric)=1005, Current Rating=550mA, DC Current=500mA, DC Resistance (DCR)=190mR, Frequency=100MHz, Max Operating Temperature=125°C, Min Operating Temperature=-55°C, Package Quantity=1, Tolerance=25%, Case/Package=0402, Core Material=Ferrite, Depth=0.55mm, Height=0.5mm, Impedance=120R, Lead Free="Lead Free", Length=1mm, Material=Steel, Max Current Rating=550mA, Max DC Current=500mA, Military Standard=Not, Number of Circuits=1, Number of Lines=1, Number of Pins=2, Packaging="Tape and Reel", Radiation Hardening=No, REACH SVHC="No SVHC", Shielding=Unshielded, Termination=SMD/SMT, Test Frequency=100MHz, Width=0.5mm
FL1: "Filter", Manufacturer_Name=TDK, Mouser Part Number=810-ACM2012D9002PT00, Arrow Part Number=ACM2012D-900-2P-T00, Arrow Price/Stock=https://www.arrow.com/en/products/acm2012d-900-2p-t00/tdk?utm_currency=USD&region=nac, Datasheet Link=https://product.tdk.com/en/search/emc/emc/cmf_cmc/info/print_pdf, Height=1.3mm, Manufacturer_Part_Number=ACM2012D-900-2P-T00, Mouser Price/Stock=https://www.mouser.co.uk/ProductDetail/TDK/ACM2012D-900-2P-T00?qs=uxmvvYJjMIufvI0tFhRfZA%3D%3D
FL2: "Filter", Manufacturer_Name=TDK, Mouser Part Number=810-DLF16250LT5028A1, Arrow Part Number=DLF162500LT-5028A1, Arrow Price/Stock=https://www.arrow.com/en/products/dlf162500lt-5028a1/tdk?utm_currency=USD&region=nac, Datasheet Link=https://product.tdk.com/system/files/dam/doc/product/rf/rf/filter/catalog/rf_lpf_dlf162500lt-5028a1_en.pdf, Height=0.4mm, Manufacturer_Part_Number=DLF162500LT-5028A1, Mouser Price/Stock=https://www.mouser.co.uk/ProductDetail/TDK/DLF162500LT-5028A1?qs=U%2FZX79kHR%2FlwIbAISCs3qA%3D%3D
J1: library part CMP-245163-000001-1, "CONN RCPT USB2.0 TYPEC 5A", Current Rating=5/6.25/1.25/0.25A, Manufacturer=GCT, Package=0, Temperature="-40°C to +85°C", Temperature Range High=+85°C, Temperature Range Low=-40°C, Voltage Rating=20V, Automotive=No, Category=Conn, ComponentLink2Description=Datasheet, ComponentLink2URL=https://gct.co/files/drawings/usb4105.pdf, Conn Orientation="Right Angle", Contact Material=Gold,Nickel, Device Class L1=Connectors, Device Class L2="USB Connectors", Device Class L3=unset, Digikey Description="CONN RCPT USB2.0 TYPEC 5A", Height=3.46mm, Is Female=yes, Lead Free=Yes, Manufacturer Part Number=USB4105-GF-A, Number Of Contacts=16, Octopart=https://octopart.com/usb4105-gf-a-gct-106627878, RoHS=TRUE, Usb Standard="USB 2.0"
J2: library part CMP-17439-000616-1, "CONN HEADER SMD 3POS 1.25MM", Color=Natural, Flammability Rating="UL94 V-0", Max Operating Temperature=85°C, Min Operating Temperature=-25°C, Voltage Rating=50V, Connector Type=Header, Contact Finish - Mating=TIN, Contact Material=Bronze, Contact Plating=Tin, Contact Shape=Rectangular, Contact Type="Outer Shroud Contact", Fastening Type=Ramp, Insulation Color=Natural, Insulation Material=Nylon, Lead Free="Lead Free", Mated Stacking Heights=7.3mm, Mount="Surface Mount", Number of Positions=3, Number of Rows=1, Packaging="Cut Tape", Pitch=0.049inch, Series=GH, Termination=Solder
L1: library part CMP-06042-002082-1, "Wire Wound RF Inductor 10nH ±2% 500mA 0.17Ω 0402 (1005)", Case Code (Imperial)=0402, Case Code (Metric)=1005, Current=370mA, Current Rating=500mA, DC Resistance (DCR)=170mR, Inductance=10nH, Inductance Tolerance=2%, Max Operating Temperature=125°C, Min Operating Temperature=-55°C, Package Quantity=10000, Resistor Type=Wirewound, Self Resonant Frequency=5.5GHz, Test Frequency=100MHz, Case/Package=0402, Core Material=Non-Magnetic, DC Current=500mA, Depth=0.7mm, Height=0.5mm, Height - Seated (Max)=0.024inch, Lead Free="Lead Free", Length=1mm, Max DC Current=500mA, Military Standard=Not, Mount="Surface Mount", Number of Pins=2, Packaging="Tape and Reel", Radiation Hardening=No, REACH SVHC="No SVHC", Shielding=Unshielded, Termination=SMD/SMT, Tolerance=2%, Weight=2.8E-05oz, Width=0.02inch
L2: library part CMP-2000-06587-2, "FIXED IND 10UH 100MA 780MOHM SMD", Case Code (Imperial)=0805, Case Code (Metric)=2012, Current Rating=100mA, DC Resistance (DCR)=780mR, Max Operating Temperature=125°C, Min Operating Temperature=-55°C, Package Quantity=3000, Self Resonant Frequency=15MHz, Test Frequency=1MHz, Tolerance=20%, Case/Package=0805, Core Material=Ferrite, DC Current=100mA, Depth=1.45mm, Height=1.45mm, Height - Seated (Max)=0.057inch, Inductance=10uH, Lead Free="Lead Free", Length=2.2mm, Max DC Current=100mA, Military Standard=Not, Mount="Surface Mount", Packaging="Tape and Reel", Radiation Hardening=No, Rated Current-Max=100mA, RoHS Compliant=Yes, Saturation Current=100mA, Series=LQM21F_70, Shielding=Shielded, Termination=SMD/SMT, Width=0.049inch
L3: library part CMP-06042-002082-1, "LQG15HS2N7S02", Case Code (Imperial)=0402, Case Code (Metric)=1005, Current=370mA, Current Rating=500mA, DC Resistance (DCR)=170mR, Inductance Tolerance=2%, Max Operating Temperature=125°C, Min Operating Temperature=-55°C, Package Quantity=10000, Resistor Type=Wirewound, Self Resonant Frequency=5.5GHz, Test Frequency=100MHz, Case/Package=0402, Core Material=Non-Magnetic, DC Current=500mA, Depth=0.7mm, Height=0.5mm, Height - Seated (Max)=0.024inch, Inductance=10nH, Lead Free="Lead Free", Length=1mm, Max DC Current=500mA, Military Standard=Not, Mount="Surface Mount", Number of Pins=2, Packaging="Tape and Reel", Radiation Hardening=No, REACH SVHC="No SVHC", Shielding=Unshielded, Termination=SMD/SMT, Tolerance=2%, Weight=2.8E-05oz, Width=0.02inch
LED1: "LED", Arrow Part Number=19-217/GHC-YR1S2/3T, Manufacturer_Name=Everlight, Mouser Part Number=638-19217GHCYR1S23T, Arrow Price/Stock=https://www.arrow.com/en/products/19-217ghc-yr1s23t/everlight-electronics, Datasheet Link=https://www.mouser.co.uk/datasheet/2/143/19-217-GHC-YR1S2-3T-1663276.pdf, Height=0.5mm, Manufacturer_Part_Number=19-217/GHC-YR1S2/3T, Mouser Price/Stock=https://www.mouser.co.uk/ProductDetail/Everlight/19-217-GHC-YR1S2-3T?qs=8cKuZ6Ok2lZjmFTUzVFjDg%3D%3D
Q1: "MOSFET (P-Channel)", Manufacturer_Name=Toshiba, Mouser Part Number=757-SSM3J332RLF, Arrow Part Number=SSM3J332R,LF, Arrow Price/Stock=https://www.arrow.com/en/products/ssm3j332rlf/toshiba?region=nac, Datasheet Link=https://www.mouser.com/datasheet/2/408/SSM3J332R_datasheet_en_20181015-1150575.pdf, Manufacturer_Part_Number=SSM3J332R,LF, Mouser Price/Stock=https://www.mouser.co.uk/ProductDetail/Toshiba/SSM3J332RLF?qs=%252B8yZ8wZTKG5UW86maIHWeg%3D%3D
R1 R2 R3: library part RES_0603, "Resistor SMD 0603"
R4 R5 R6 R7 R8 R9 R10 R11 R12 R13 R14 R15 R16 R17 R18 R19 R20 R21 R22 R23 R24 R25 R26: library part R_0402, "Resistor SMD 0402"
SW1: library part "Omron B3U-1000P_Switch", "SWITCH TACTILE SPST-NO 0.05A 12V", Contact Current Rating=50mA, Contact Resistance=100mR, Insulation Resistance=100MR, Max Operating Temperature=70°C, Max Voltage Rating (DC)=12V, Min Operating Temperature=-25°C, Operating Force=1.5N, Package Quantity=1, Ratings="Dust Proof", Actuator Length=0.4mm, Actuator Type=Standard, Contact Material=Silver, Current Rating=50mA, Depth=2.5mm, Electrical Life=200000Cycles, Height=1.2mm, Illumination Type=Non-Illuminated, Lead Free="Lead Free", Length=4mm, Max Current Rating=50mA, Mechanical Life=200000Cycles, Mount="Surface Mount", Orientation=Straight, Packaging="Tape and Reel", Switch Function=Off-Mom, Switch Travel=0.15mm, Termination=SMD/SMT, Throw Configuration=SPST, Voltage Rating (DC)=12V, Weight=0.000776oz, Width=3mm
TP2 TP3 TP4 TP5 TP6 TP7 TP9 TP_+1: library part TestPoint
U1: library part MCP73833T-FCI-UN, "IC LI-ION/LI-POLY CTRLR 10MSOP", Battery Pack Voltage=4.2V, Case/Package=MSOP, Max Charge Current=1.1A, Max Operating Temperature=85°C, Max Supply Voltage=6V, Min Operating Temperature=-40°C, Min Supply Voltage=3.75V, Output Current=1.2A, Output Voltage=4.5V, Package Quantity=2500, Fault Protection="Over Temperature", Lead Free="Lead Free", Mount="Surface Mount", Number of Cells=1, Number of Pins=10, Packaging="Tape and Reel", Radiation Hardening=No
U2: library part CMP-04917-000286-1, "IC REG LINEAR 3.3V 200MA SOT23-5", RoHS Compliant=Yes
U3: library part CMP-12105-000013-1, "ULTRA-LOW-POWER DUAL CORE ARM CO", Ambient Temperature Range High=+85°C, Ambient Temperature Range Low=-40°C, Frequency=64MHz, Manufacturer=STMicroelectronics, Max Junction Temp=+105°C, Max Supply Voltage=3.6V, Min Supply Voltage=1.71V, Package=UFQFPN48, Temperature="-40°C to +105°C", Automotive=No, Category=IC, ComponentLink2Description=Datasheet, ComponentLink2URL=https://www.st.com/resource/en/datasheet/stm32wb55cg.pdf, Core Architecture="ARM Cortex-M4", Data Bus Width=32bits, Device Class L1="Integrated Circuits (ICs)", Device Class L2="Embedded Processors and Controllers", Device Class L3=Microcontrollers, Digikey Description="ULTRA-LOW-POWER DUAL CORE ARM CO", Height=0.65mm, Interface=I2C,SPI,UART,USART,2-Wire,USB,IrDA,Other, Lead Free=Yes, Manufacturer Part Number=STM32WB55CGU6, Memory Size=1MBytes, Memory Type=FLASH, Number Of A/D Converters=1, Number Of Adc Channels=13, Number Of Cores=1, Number Of I2C Channels=2, Number Of I/Os=30, Number Of Pwm Channels=14, Number Of Spi Channels=1, Number Of Timers/Counters=6, Number Of Uart Channels=2, Number Of Usb Channels=1, Octopart=https://octopart.com/stm32wb55cgu6-stmicroelectronics-98750847, Ram Size=256KBytes, RoHS=TRUE, Standoff Height=0mm, Temperature Range High=+105°C, Temperature Range Low=-40°C
U4: "Integrated Circuit", Manufacturer_Name="Texas Instruments", Mouser Part Number=595-TMP117NAIDRVR, Arrow Part Number=TMP117NAIDRVR, Arrow Price/Stock=https://www.arrow.com/en/products/tmp117naidrvr/texas-instruments?utm_currency=USD&region=nac, Datasheet Link=http://www.ti.com/lit/gpn/tmp117, Height=0.8mm, Manufacturer_Part_Number=TMP117NAIDRVR, Mouser Price/Stock=https://www.mouser.co.uk/ProductDetail/Texas-Instruments/TMP117NAIDRVR?qs=qSfuJ%252Bfl%2Fd51FgClPJTgfg%3D%3D
U5: "IC SINGLE CHANNEL LOAD SWITCH", Ambient Temperature Range High=105°C, Case/Package=SOT-23, Manufacturer Lifecycle Status=ACTIVE, Max Junction Temperature (Tj)=125°C, Max Output Current=2A, Max Supply Voltage=5.5V, Min Operating Temperature=-40°C, Min Supply Voltage=1V, Fall Time=2µs, Height=1.45mm, Interface=On/Off, Lead Free="Lead Free", Length=2.9mm, Lifecycle Status=Production, Max Operating Temperature=105°C, NexarPartId=71360943, Number of Channels=1, Number of Drivers=1, Number of Outputs=1, Number of Pins=6, Output Configuration="High Side", Output Current=2A, Rise Time=2.54ms, RoHS=Compliant, Schedule B="8542390000, 8542390000|8542390000|8542390000|8542390000|8542390000|8542390000|8542390000|8542390000|8542390000|8542390000|8542390000|8542390000|8542390000|8542390000|8542390000|8542390000|8542390000|8542390000|8542390000|8542390000|8542390000|8542390000|8542390000|85", Thickness=1.2mm, Turn-Off Delay Time=2µs, Turn-On Delay Time=1.95ms, Width=1.6mm
U6: "Integrated Circuit", Manufacturer_Name=BOSCH, Mouser Part Number=262-BMI270, Arrow Part Number=BMI270, Arrow Price/Stock=https://www.arrow.com/en/products/bmi270/bosch-sensortec?utm_currency=USD&region=nac, Datasheet Link=https://www.bosch-sensortec.com/media/boschsensortec/downloads/datasheets/bst-bmi270-ds000.pdf, Height=0.87mm, Manufacturer_Part_Number=BMI270, Mouser Price/Stock=https://www.mouser.co.uk/ProductDetail/Bosch-Sensortec/BMI270?qs=u16ybLDytRYIj%252BjQEee88A%3D%3D
Y1: library part NX3225SA-32MHZ-EXS00A-CS02368, "Crystal or Oscillator", Manufacturer_Name=NDK, Mouser Part Number=344-NX3225SA32MHZEXS, Datasheet Link=https://hu.mouser.com/datasheet/2/905/ndk_04232018_NX3225SA-32MHZ-EXS00A-CS02368-1324924.pdf, Height=0.6mm, Manufacturer_Part_Number=NX3225SA-32MHZ-EXS00A-CS02368, Mouser Price/Stock=https://www.mouser.co.uk/ProductDetail/NDK/NX3225SA-32MHZ-EXS00A-CS02368?qs=55YtniHzbhCu90OOsHDzwg%3D%3D
Y2: library part ABS07-32.768KHZ-7-T, "Crystal or Oscillator", Manufacturer_Name=ABRACON, Mouser Part Number=815-ABS07-32.768K7T, Arrow Part Number=ABS07-32.768KHZ-7-T, Arrow Price/Stock=https://www.arrow.com/en/products/abs07-32.768khz-7-t/abracon?utm_currency=USD&region=europe, Datasheet Link=https://abracon.com/Resonators/ABS07.pdf, Height=0.9mm, Manufacturer_Part_Number=ABS07-32.768KHZ-7-T, Mouser Price/Stock=https://www.mouser.co.uk/ProductDetail/ABRACON/ABS07-32.768KHZ-7-T?qs=2nyfZ6BV3oibNEFok2qBLA%3D%3D

## Nets (pads, with @x,y where several pads share a name; then routed paths per layer and width w, separated by ;. In a path a pad name is that pad's centre, name@x,y a point inside that pad or via, vN(x,y) a via of type N, cw(c..) or ccw(c..) an arc to the next point about the centre after c; other vN are vias at no path point)
3V3_SENS: C32.2 C33.2 R19.2 R21.2 U4.5 U6.5 U6.8
+3V3_SYS: C1.2 C2.2 C12.2 C13.2 C14.2 C15.2 C16.2 C17.2 C18.2 C21.2 C28.2 C29.2 FB2.1 J3.1 R16.2 R22.2 R23.2 TP9.1 TP_+1.1 U2.5 U3.1 U3.8 U3.20 U3.23 U3.35 U3.40 U3.48 U5.6
+3V3_SYS_RB: C30.2 FB2.2 U5.1
BAT_NTC_10K: J2.3 TP7.1
BMI270_INT1: R25.2 U3.42 U6.4
BMI270_INT2: R26.2 U3.45 U6.9
BOOT0: R17.2 TP8.1 U3.4
BTN1: R24.2 U3.14
BTN1_R: C31.2 D3.1 R23.1 R24.1 SW1.1
CHG_PG: R1.1 TP4.1 U1.7
CHG_PROG: R4.2 U1.6
CHG_STAT1: R3.1 TP2.1 U1.3
CHG_STAT2: R2.1 TP3.1 U1.4
GND: C1.1 C2.1 C3.1 C4.1 C5.1 C6.1 C7.1 C8.1 C9.1 C10.1 C11.1 C12.1 C13.1 C14.1 C15.1 C16.1 C17.1 C18.1 C19.1 C20.1 C21.1 C22.1 C23.1 C24.1 C25.1 C26.1 C27.1 C28.1 C29.1 C30.1 C31.1 C32.1 C33.1 D1.2 D2.2 D3.2 ESD_CC1.2 ESD_CC2.2 ESD_RF1.2 FL2.2 FL2.4 J1.A1-B12 J1.B1-A12 J2.2 J3.5 R4.1 R6.1 R7.2 R8.2 R9.1 R17.1 R20.1 R25.1 R26.1 SW1.2 TP_GND1.1 U1.5 U2.2 U3.22 U3.32 U3.49 U4.2 U4.4 U5.2 U6.1 U6.6 U6.7 Y1.2 Y1.4
HSE_IN: C26.2 U3.25 Y1.3
HSE_OUT: R18.2 U3.24
I2C_SENS_MCU_SCL: R14.1 U3.46
I2C_SENS_MCU_SDA: R15.1 U3.47
I2C_SENS_SCL: R14.2 U4.1 U6.13
I2C_SENS_SDA: R15.2 U4.6 U6.14
LED_STAT_N: LED1.1 U3.13
LSE_IN: C24.2 U3.2 Y2.1
LSE_OUT: C23.2 U3.3 Y2.2
MNT: C9.2 J1.1 J1.2 J1.3 J1.4 R9.2
NetANT1_2: ANT1.2
NetJ1_A8: J1.A8
NetJ1_B8: J1.B8
NetJ2_4: J2.4
NetJ2_5: J2.5
NetJ3_2: J3.2 R11.2
NetJ3_4: J3.4 R13.2
NetLED1_2: LED1.2 R22.1
NetQ1_1: Q1.1 R5.2 R6.2
NetR21_1: R21.1 U6.12
NetU1_8: U1.8
NetU2_4: U2.4
NetU3_5: U3.5
NetU3_6: U3.6
NetU3_9: U3.9
NetU3_10: U3.10
NetU3_12: U3.12
NetU3_15: U3.15
NetU3_16: U3.16
NetU3_18: U3.18
NetU3_19: U3.19
NetU3_26: U3.26
NetU3_27: U3.27
NetU3_28: U3.28
NetU3_29: U3.29
NetU3_30: U3.30
NetU3_36: U3.36
NetU3_44: U3.44
NetU4_7: U4.7
NetU5_4: U5.4
NetU5_5: U5.5
NetU6_2: U6.2
NetU6_3: U6.3
NetU6_10: U6.10
NetU6_11: U6.11
NRESET: C25.2 J3.3 R16.1 U3.7
R_HSE_OUT: C27.2 R18.1 Y1.1
RF1: C10.2 L1.1 U3.21
RF1_ANT: ANT1.1 ESD_RF1.1 FL2.3
RF1_FLT: C11.2 FL2.1 L1.2
SENS_EN: R20.2 U3.17 U5.3
SMPSFB: C22.2 L3.1 U3.31
SMPSLX: L2.2 U3.33
SMPSLXL: L2.1 L3.2
SWCLK: R13.1 U3.41
SWDIO: R11.1 U3.39
SWO: J3.6 U3.43
TMP117_ALERT: R19.1 U3.11 U4.3
USB_CC1: ESD_CC2.1 J1.A5 R8.1
USB_CC2: ESD_CC1.1 J1.B5 R7.1
USB_FS_CONN_N: D2.3 J1.A7 J1.B7
USB_FS_CONN_P: D2.1 J1.A6 J1.B6
USB_FS_FIL_N: D2.4 FL1.2
USB_FS_FIL_P: D2.6 FL1.1
USB_FS_N: R10.1 U3.37
USB_FS_P: R12.1 U3.38
USB_FS_R_N: FL1.3 R10.2
USB_FS_R_P: FL1.4 R12.2
USB_VBUS: D1.1 D2.5 F1.1 J1.A4-B9 J1.B4-A9 TP5.1
VBAT_PROT: C3.2 C6.2 C7.2 Q1.2 R5.1 TP1.1 TP6.1 U1.9 U1.10 U2.1 U2.3
VBATT_RAW: J2.1 Q1.3
VDDMPS: C19.2 C20.2 U3.34
VIN_CHG: C4.2 C5.2 C8.2 FB1.2 R1.2 R2.2 R3.2 U1.1 U1.2
VIN_CHG_F: F1.2 FB1.1
pads on no net: J1. J3.
copper on no net: | length 4.6
  L3_PWR_SIG w0.2: 41.4,50.3 41.45,50.3 44.502,47.248 44.502,47.098 44.55,47.05

## Polygon pours and split planes (outlines as drawn)
BAT_NTC_10K on Top Solder (solid): 0.8,43 0.8,41.4 3.2,41.4 4,42.2 4,43
GND on L2_GND (split plane): 85.49,39.51 45.51,39.51 45.51,68.49 85.49,68.49

## Silkscreen, mask and mechanical layers (free items; w line width, h text height)
Top Overlay:
  lines w0.1: 36.7,50.4 36.7,50.8 37.5,50.8 39.8,50.8 39.8,50.5 ; 37.5,50.2 37.5,50.5 39,50.5 39,50.2
Top Solder:
  region: 4.8,17 8.5,17 8.6,16.9 8.6,15.1 7.7,15.1 7.4,14.8 5,14.8 4.8,15
Mechanical 1:
  the board outline again, w0.1